# EAGLE board BMS (EAGLE 6.6.0)
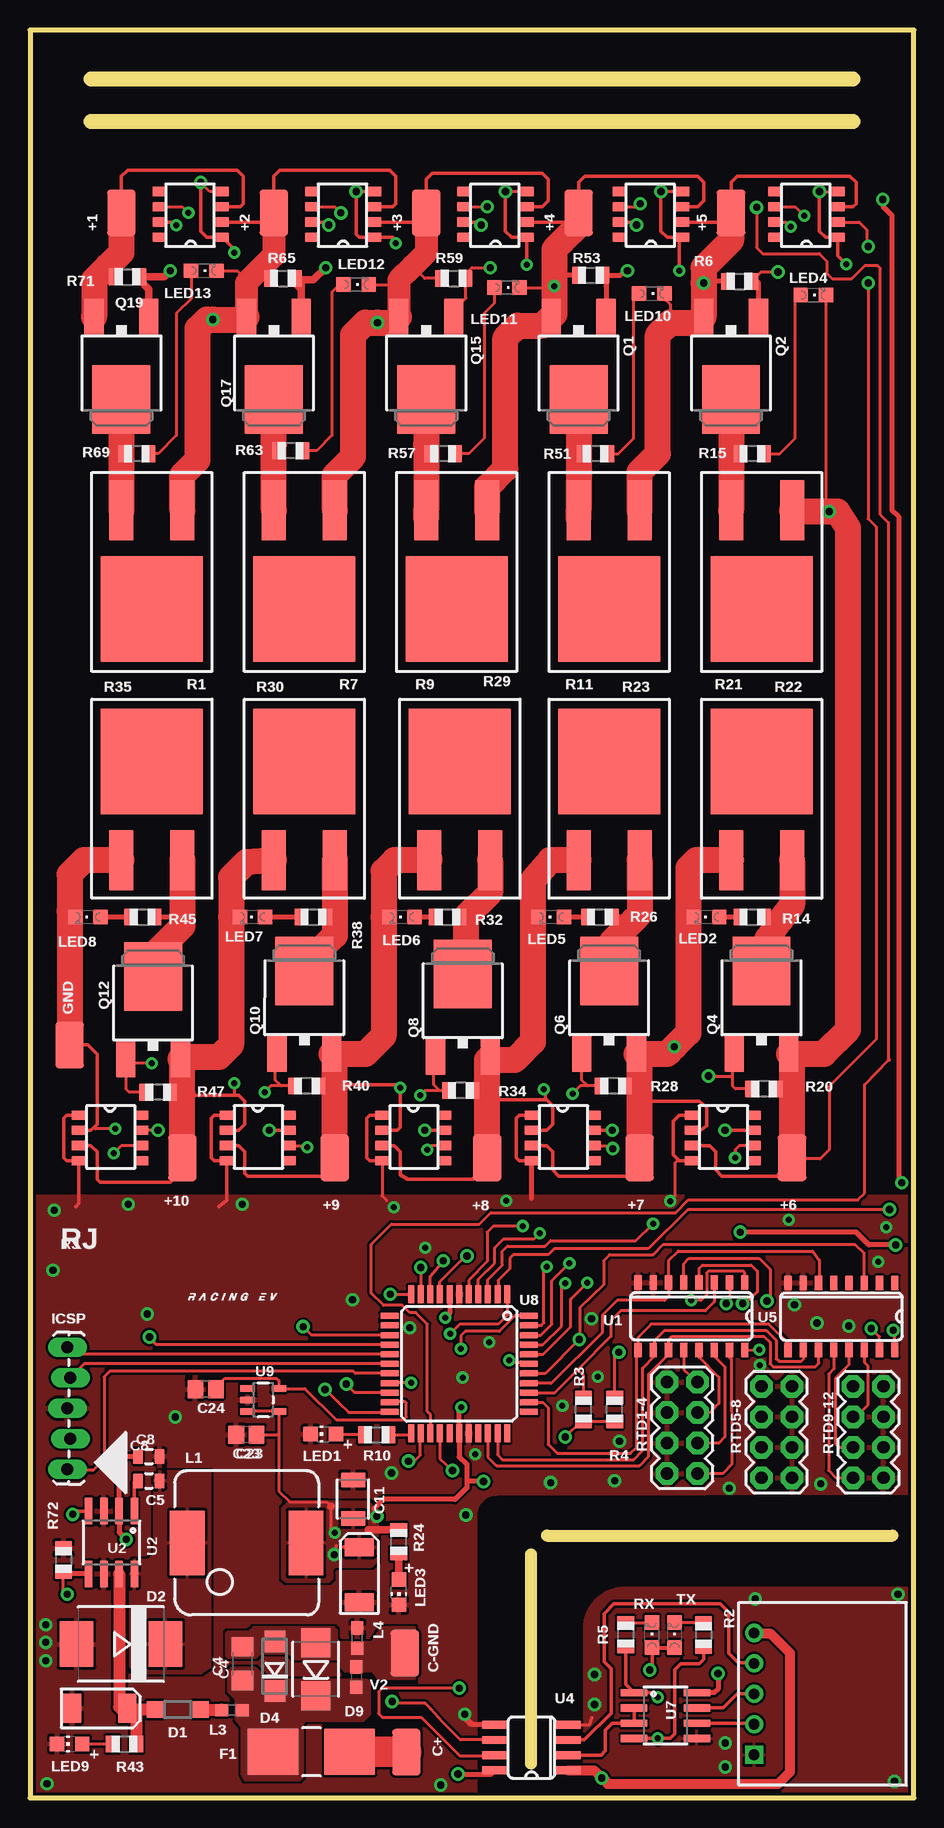
[diagram p0: board, top side]
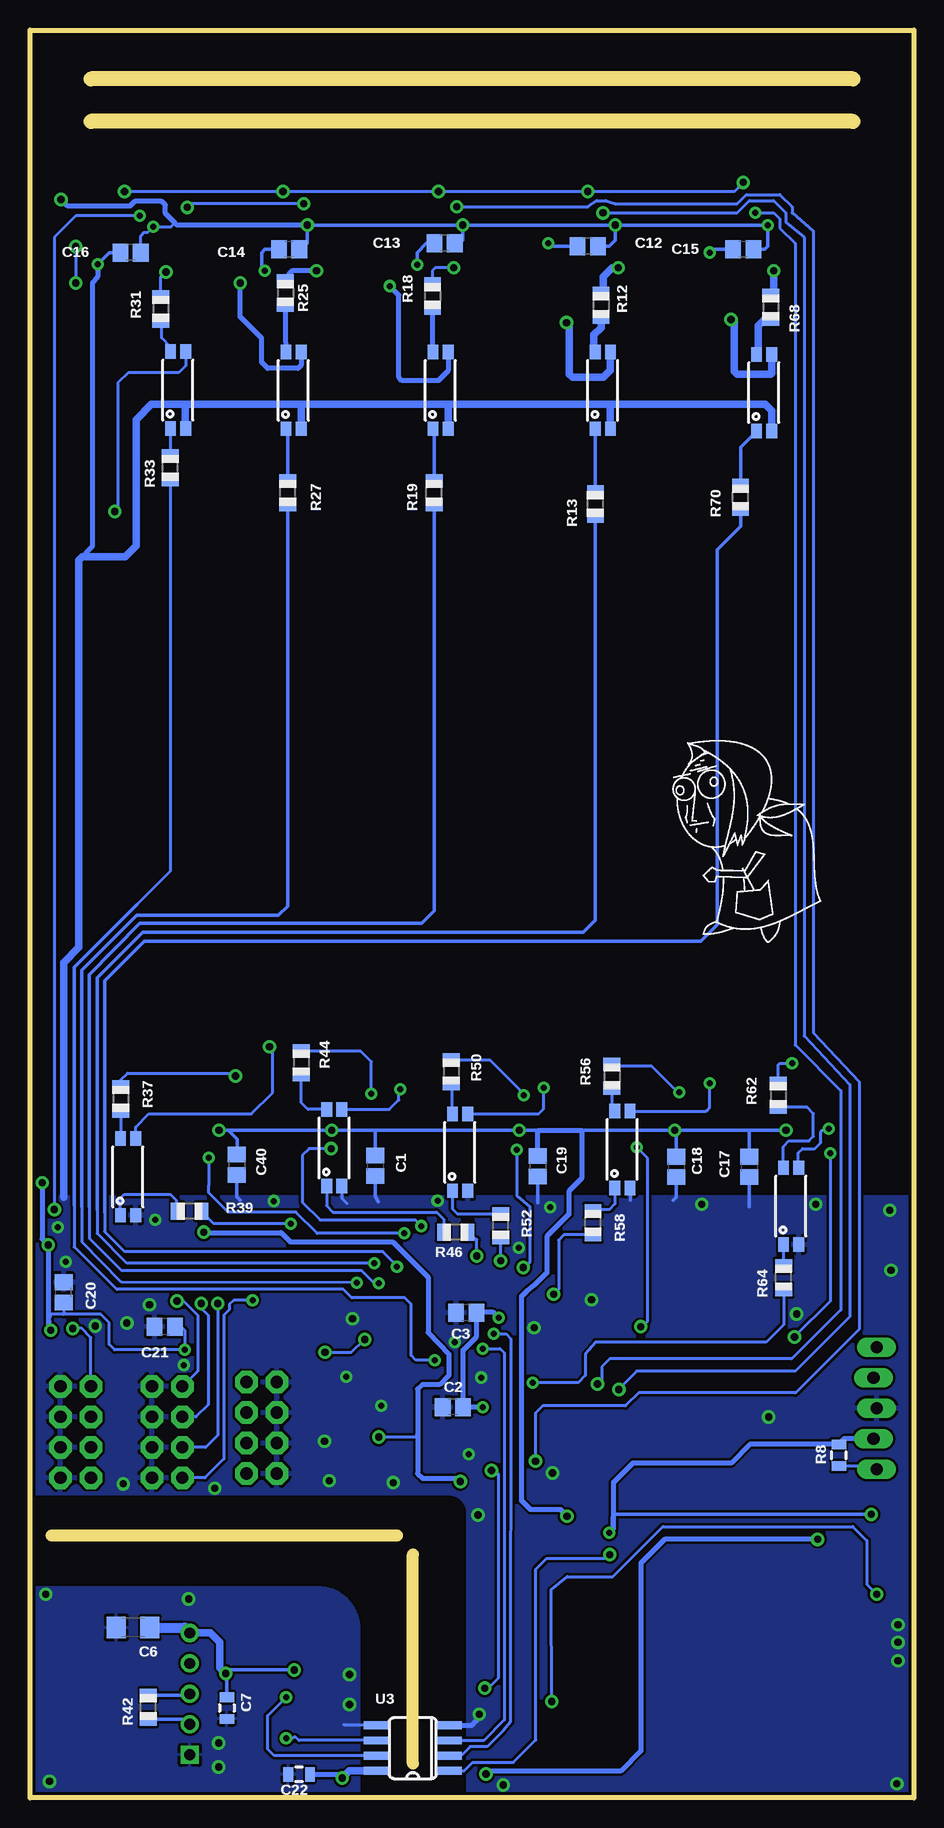
[diagram p1: board, bottom side, seen from below]

Size 73.66 x 147.32 mm. Coordinates in mm from the lower left corner, seen from the top.
Outline: 5.08,143.26 68.58,143.26
Outline: 5.08,139.7 68.58,139.7
Outline: 41.76,2.85 41.76,20.27
Outline: 43.07,21.84 71.88,21.84
Outline: 0,0 73.66,0 73.66,147.32 0,147.32 0,0
Copper layers (1*16): Top 0.035mm / dielectric 1.5mm / Bottom 0.035mm
Design rules "SparkFun": minimum track width 8mil, minimum drill 20mil, track to track 8mil, track to pad 8mil, pad to pad 8mil, via to via 8mil, smd to smd 8mil, copper to edge 10mil, drill to drill 8mil, minimum pad ring 12mil, minimum via ring 10mil, stop-mask expansion 4mil, vias tented up to drill 25mil, thermal gap 10mil

## Footprints (pad centres in the part's own frame; a part is rotated, then mirrored left to right if it is on the bottom)
LUXEON-PAD = smd 3.9 x 2.4: P$1 0,0
C0805 = smd 1.3 x 1.5: 1 -0.85,0; 2 0.85,0
1206 = smd 1.6 x 1.8: 1 -1.4,0; 2 1.4,0
0805 = smd 0.8 x 1.2: 1 -0.9,0; 2 0.9,0
EIA6032 = smd 1.5 x 2.4: P$1 -2.3,0; P$2 2.3,0
1210 = smd 1.2 x 2: 1 -1.6,0; 2 1.6,0
SOD123 = smd 1.4 x 1.4: A 1.9,0; C -1.9,0
SMC = smd 2.8 x 3.8: A 3.7,0; C -3.7,0
DO-214AC = smd 1.8 x 1.7: A 2.05,0; C -2.05,0
SMB-DIODE = smd 2.4 x 2.4: A 2.2,0; C -2.2,0
0154XXDR = smd 4.24 x 3.81: 1 -3.19,0; 2 3.19,0
1X05_LOCK_LONGPADS = drill 1.016 long: 1 0,0; 2 2.54,-0.254; 3 5.08,0; 4 7.62,-0.254; 5 10.16,0
INDUCTOR_5X3 = smd 2.9 x 5.4: 1 -4.95,0; 2 4.95,0
0603 = smd 1.1 x 1: 1 -0.85,0; 2 0.85,0
CHIP-LED0805 = smd 1.2 x 1.2: A 0,-1.05; C 0,1.05
CHIPLED_0805 = smd 1.2 x 1.2: A 0,-1.05; C 0,1.05
DPAK = smd 1.6 x 3: 1 -2.28,-4.04; 3 2.28,-4.04 | smd 4.826 x 5.715: 2 0,2.858
PFC10-5RF1 = smd 2 x 5: 1 -2.54,-8.22; 2 2.54,-8.22 | smd 8.5 x 8.8: TP 0,0
R0805 = smd 1.1 x 1.4: 1 -1,0; 2 1,0
2X4 = drill 1.016 pad 1.88 octagon: 1 -3.81,-1.27; 2 -3.81,1.27; 3 -1.27,-1.27; 4 -1.27,1.27; 5 1.27,-1.27; 6 1.27,1.27; 7 3.81,-1.27; 8 3.81,1.27
SO-16 = smd 0.6 x 1.2: 1 -4.445,-2.8; 2 -3.175,-2.8; 3 -1.905,-2.8; 4 -0.635,-2.8; 5 0.635,-2.8; 6 1.905,-2.8; 7 3.175,-2.8; 8 4.445,-2.8; 9 4.445,2.8; 10 3.175,2.8; 11 1.905,2.8; 12 0.635,2.8; 13 -0.635,2.8; 14 -1.905,2.8; 15 -3.175,2.8; 16 -4.445,2.8
SO-8 = smd 0.61 x 2.21: 1 -1.905,-2.616; 2 -0.635,-2.616; 3 0.635,-2.616; 4 1.905,-2.616; 5 1.905,2.616; 6 0.635,2.616; 7 -0.635,2.616; 8 -1.905,2.616
SOIC-8 = smd 0.66 x 2.032: 1 -1.905,-3.073; 2 -0.635,-3.073; 3 0.635,-3.073; 4 1.905,-3.073; 5 1.905,3.073; 6 0.635,3.073; 7 -0.635,3.073; 8 -1.905,3.073
5-103635-4 = drill 0.9 square: 1 -5.08,0 | drill 0.9: 2 -2.54,0; 3 0,0; 4 2.54,0; 5 5.08,0
TQFP-44 = smd 1.5 x 0.5: 1 -5.8,4; 2 -5.8,3.2; 3 -5.8,2.4; 4 -5.8,1.6; 5 -5.8,0.8; 6 -5.8,0; 7 -5.8,-0.8; 8 -5.8,-1.6; 9 -5.8,-2.4; 10 -5.8,-3.2; 11 -5.8,-4; 23 5.8,-4; 24 5.8,-3.2; 25 5.8,-2.4; 26 5.8,-1.6; 27 5.8,-0.8; 28 5.8,0; 29 5.8,0.8; 30 5.8,1.6; 31 5.8,2.4; 32 5.8,3.2; 33 5.8,4 | smd 0.5 x 1.5: 12 -4,-5.8; 13 -3.2,-5.8; 14 -2.4,-5.8; 15 -1.6,-5.8; 16 -0.8,-5.8; 17 0,-5.8; 18 0.8,-5.8; 19 1.6,-5.8; 20 2.4,-5.8; 21 3.2,-5.8; 22 4,-5.8; 34 4,5.8; 35 3.2,5.8; 36 2.4,5.8; 37 1.6,5.8; 38 0.8,5.8; 39 0,5.8; 40 -0.8,5.8; 41 -1.6,5.8; 42 -2.4,5.8; 43 -3.2,5.8; 44 -4,5.8
SOT23-5 = smd 0.55 x 1.2: 1 -0.95,-1.3; 2 0,-1.3; 3 0.95,-1.3; 4 0.95,1.3; 5 -0.95,1.3
LT1990 = smd 0.762 x 1.143: 1 0,0; 2 1.27,0; 3 2.54,0; 4 3.81,0; 5 3.81,5.207; 6 2.54,5.207; 7 1.27,5.207; 8 0,5.207
SSOP-4 = smd 1.2 x 0.9: 1 -3.2,0.67; 2 -3.2,-0.6; 3 3.2,-0.6; 4 3.2,0.67

## Placement (x,y rotation side)
+1  M01SMD  [LUXEON-PAD]  7.62,132.08 90 top
+2  M01SMD  [LUXEON-PAD]  20.32,132.08 90 top
+3  M01SMD  [LUXEON-PAD]  33.02,132.08 90 top
+4  M01SMD  [LUXEON-PAD]  45.72,132.08 90 top
+5  M01SMD  [LUXEON-PAD]  58.42,132.08 90 top
+6  M01SMD  [LUXEON-PAD]  63.5,53.34 90 top
+7  M01SMD  [LUXEON-PAD]  50.8,53.34 90 top
+8  M01SMD  [LUXEON-PAD]  38.1,53.34 90 top
+9  M01SMD  [LUXEON-PAD]  25.4,53.34 90 top
+10  M01SMD  [LUXEON-PAD]  12.7,53.34 90 top
C1  .1uF  [C0805]  44.89,52.67 270 bottom
C2  .1uF  [C0805]  38.41,32.57 180 bottom
C3  .1uF  [C0805]  37.3,40.43 180 bottom
C4  1uF  [1206]  17.72,11.18 90 top
C5  0.1uF  [0805]  9.91,26.42 0 top
C6  10uF  [1206]  65.07,14.19 180 bottom
C7  .1uF  [0805]  57.26,7.49 270 bottom
C8  0.1uF  [0805]  9.91,28.45 0 top
C9  68uF  [EIA6032]  27.45,18.6 270 top
C10  68uF  [EIA6032]  5.8,7.46 180 top
C11  1uF  [1210]  26.92,24.89 90 top
C12  .1uF  [C0805]  27.18,129.29 180 bottom
C13  .1uF  [C0805]  39.12,129.54 180 bottom
C14  .1uF  [C0805]  52.07,129.03 180 bottom
C15  .1uF  [C0805]  14.22,129.03 180 bottom
C16  .1uF  [C0805]  65.28,128.78 180 bottom
C17  .1uF  [C0805]  13.72,52.58 270 bottom
C18  .1uF  [C0805]  19.81,52.58 270 bottom
C19  .1uF  [C0805]  31.34,52.63 270 bottom
C20  .1uF  [C0805]  70.87,42.11 90 bottom
C21  .1uF  [C0805]  62.43,39.27 180 bottom
C22  .1uF  [0805]  51.24,1.96 180 bottom
C23  .1uF  [C0805]  18.04,30.26 180 top
C24  .1uF  [C0805]  14.64,34.06 180 top
C40  .1uF  [C0805]  56.43,52.76 270 bottom
C+  M01SMD  [LUXEON-PAD]  31.37,3.81 90 top
C-GND  M01SMD  [LUXEON-PAD]  31.24,12.06 270 top
D1  1N4001  [SOD123]  12.31,7.35 0 top
D2  VS-30BQ060TRPBF  [SMC]  7.58,12.82 180 top
D4  TVS  [DO-214AC]  20.41,10.97 90 top
D9  45V  [SMB-DIODE]  23.81,10.71 90 top
F1  01541.25DR  [0154XXDR]  23.44,3.83 180 top
GND  M01SMD  [LUXEON-PAD]  3.3,62.74 270 top
ICSP  [1X05_LOCK_LONGPADS]  3.11,27.39 90 top
L1  7447714101  [INDUCTOR_5X3]  18.05,21.24 0 top
L3  FERITEBEAD  [0603]  16.84,7.31 180 top
L4  FERITEBEAD  [0603]  27.29,13.31 90 top
LED1  [CHIP-LED0805]  24.44,30.32 90 top
LED2  [CHIPLED_0805]  56.39,73.41 90 top
LED3  [CHIP-LED0805]  30.73,17.14 180 top
LED4  [CHIPLED_0805]  65.28,125.22 270 top
LED5  [CHIPLED_0805]  43.43,73.41 90 top
LED6  [CHIPLED_0805]  30.99,73.41 90 top
LED7  [CHIPLED_0805]  18.54,73.41 90 top
LED8  [CHIPLED_0805]  4.83,73.41 90 top
LED9  [CHIP-LED0805]  3.31,4.49 90 top
LED10  [CHIPLED_0805]  51.82,125.35 270 top
LED11  [CHIPLED_0805]  39.75,125.86 270 top
LED12  [CHIPLED_0805]  27.18,126.11 270 top
LED13  [CHIPLED_0805]  14.48,127.25 270 top
Q1  MJD127T4  [DPAK]  45.72,119.38 180 top
Q2  MJD127T4  [DPAK]  58.42,119.38 180 top
Q4  MJD127T4  [DPAK]  60.96,66.04 0 top
Q6  MJD127T4  [DPAK]  48.26,66.04 0 top
Q8  MJD127T4  [DPAK]  36.07,65.79 0 top
Q10  MJD127T4  [DPAK]  22.86,66.04 0 top
Q12  MJD127T4  [DPAK]  10.26,65.6 0 top
Q15  MJD127T4  [DPAK]  33.02,119.38 180 top
Q17  MJD127T4  [DPAK]  20.32,119.38 180 top
Q19  MJD127T4  [DPAK]  7.62,119.38 180 top
R1  PFC10-5RF1  [PFC10-5RF1]  10.16,86.36 0 top
R2  1k  [R0805]  56.13,13.56 270 top
R3  10k  [R0805]  46.13,32.36 90 top
R4  10k  [R0805]  48.72,32.36 90 top
R5  1k  [R0805]  49.63,13.59 270 top
R6  10k  [R0805]  59.13,126.37 0 top
R7  PFC10-5RF1  [PFC10-5RF1]  22.86,86.36 0 top
R8  10k  [0805]  6.26,28.55 90 bottom
R9  PFC10-5RF1  [PFC10-5RF1]  35.81,86.36 0 top
R10  1k  [R0805]  28.9,30.26 0 top
R11  PFC10-5RF1  [PFC10-5RF1]  48.26,86.36 0 top
R12  330  [R0805]  26.08,124.39 270 bottom
R13  200  [R0805]  26.54,107.82 90 bottom
R14  399  [R0805]  60.2,73.41 0 top
R15  399  [R0805]  60.2,112.01 180 top
R18  330  [R0805]  40.12,125.15 270 bottom
R19  200  [R0805]  39.99,108.75 90 bottom
R20  10k  [R0805]  61.17,59.07 180 top
R21  PFC10-5RF1  [PFC10-5RF1]  60.96,86.36 0 top
R22  PFC10-5RF1  [PFC10-5RF1]  60.96,99.06 180 top
R23  PFC10-5RF1  [PFC10-5RF1]  48.26,99.06 180 top
R24  1k  [R0805]  30.73,21.34 90 top
R25  330  [R0805]  52.38,125.4 270 bottom
R26  399  [R0805]  47.5,73.41 0 top
R27  200  [R0805]  52.19,108.75 90 bottom
R28  10k  [R0805]  48.59,59.33 180 top
R29  PFC10-5RF1  [PFC10-5RF1]  35.56,99.06 180 top
R30  PFC10-5RF1  [PFC10-5RF1]  22.86,99.06 180 top
R31  330  [R0805]  62.77,124.08 270 bottom
R32  399  [R0805]  34.8,73.41 0 top
R33  200  [R0805]  61.98,110.83 90 bottom
R34  10k  [R0805]  35.89,58.94 180 top
R35  PFC10-5RF1  [PFC10-5RF1]  10.16,99.06 180 top
R37  330  [R0805]  66.1,58.24 270 bottom
R38  399  [R0805]  23.62,73.41 0 top
R39  200  [R0805]  60.37,48.88 180 bottom
R40  10k  [R0805]  23.07,59.33 180 top
R42  120  [R0805]  63.8,7.56 90 bottom
R43  3.3k  [R0805]  7.88,4.49 0 top
R44  330  [R0805]  51.06,61.27 270 bottom
R45  399  [R0805]  9.4,73.41 0 top
R46  200  [R0805]  38.19,47.14 180 bottom
R47  10k  [R0805]  10.67,58.8 180 top
R50  330  [R0805]  38.56,60.5 270 bottom
R51  399  [R0805]  47.12,112.01 180 top
R52  200  [R0805]  34.43,47.66 90 bottom
R53  10k  [R0805]  46.74,126.87 0 top
R56  330  [R0805]  25.17,60.12 270 bottom
R57  399  [R0805]  34.42,112.01 180 top
R58  200  [R0805]  26.75,47.92 90 bottom
R59  10k  [R0805]  35.31,126.62 0 top
R62  330  [R0805]  11.3,58.55 270 bottom
R63  399  [R0805]  21.72,112.27 180 top
R64  200  [R0805]  10.86,43.35 90 bottom
R65  10k  [R0805]  21.08,126.62 0 top
R68  330  [R0805]  11.94,124.21 270 bottom
R69  399  [R0805]  8.89,112.01 180 top
R70  200  [R0805]  14.45,108.37 90 bottom
R71  10k  [R0805]  8.13,126.75 0 top
R72  10k  [R0805]  2.79,19.81 270 top
RTD1-4  M04X2  [2X4]  54.36,30.84 90 top
RTD5-8  M04X2  [2X4]  62.23,30.48 90 top
RTD9-12  M04X2  [2X4]  69.85,30.48 270 top
RX  [CHIPLED_0805]  51.82,13.56 0 top
TX  [CHIPLED_0805]  53.72,13.56 0 top
U1  SN74LV4051ADR  [SO-16]  55.12,40.13 180 top
U2  MAX5035  [SO-8]  6.79,21.28 180 top
U3  ISO7221ADR  [SOIC-8]  41.76,4.15 90 bottom
U4  ISO7221ADR  [SOIC-8]  41.79,4.19 90 top
U5  SN74LV4051ADR  [SO-16]  67.61,40.11 180 top
U6  M5  [5-103635-4]  60.34,8.66 90 top
U7  SN75HVD08DR  [SO-8]  52.96,6.86 270 top
U8  PIC18F45K22  [TQFP-44]  35.76,36.16 270 top
U9  LM4128CMF-2.0/NOPB  [SOT23-5]  19.44,33.16 270 top
U$1  LT1990  [LT1990]  55.12,56.9 270 top
U$2  LT1990  [LT1990]  41.78,56.9 270 top
U$3  LT1990  [LT1990]  29.34,56.9 270 top
U$4  LT1990  [LT1990]  16.38,56.9 270 top
U$5  LT1990  [LT1990]  4.06,56.9 270 top
U$6  LT1990  [LT1990]  54.36,130.05 90 top
U$7  LT1990  [LT1990]  41.4,130.05 90 top
U$8  LT1990  [LT1990]  28.7,130.05 90 top
U$9  LT1990  [LT1990]  16,130.05 90 top
U$10  TCMT1103-OPTO  [SSOP-4]  12.45,117.09 90 bottom
U$11  TCMT1103-OPTO  [SSOP-4]  25.89,117.29 90 bottom
U$12  TCMT1103-OPTO  [SSOP-4]  39.41,117.29 90 bottom
U$13  TCMT1103-OPTO  [SSOP-4]  51.66,117.29 90 bottom
U$14  TCMT1103-OPTO  [SSOP-4]  61.29,117.32 90 bottom
U$15  TCMT1103-OPTO  [SSOP-4]  65.45,51.75 90 bottom
U$16  TCMT1103-OPTO  [SSOP-4]  48.27,54.17 90 bottom
U$17  TCMT1103-OPTO  [SSOP-4]  37.79,53.79 90 bottom
U$18  TCMT1103-OPTO  [SSOP-4]  24.26,54.03 90 bottom
U$19  TCMT1103-OPTO  [SSOP-4]  10.21,49.31 90 bottom
U$20  INDPK1  [PICKIT-PIN-1]  5.44,27.94 270 top
U$21  OLD_LADYM  [0L-M]  20.24,71.26 0 bottom
U$22  LOGO  [L-MS]  10.16,40.64 0 top
U$55  LT1990  [LT1990]  67.31,130.05 90 top
V2  45Vdc  [0603]  27.18,10.05 270 top

## Library data of the parts
+1-+10 C+ C-GND GND ICSP RTD1-4 RTD5-8 RTD9-12 = SparkFun-Connectors
C1-C3 C12-C21 C23 C24 C40 LED1-LED13 R2-R6 R10 R12-R15 R18-R20 R24-R28 R31-R34 R37-R40 R42-R47 R50-R53 R56-R59 R62-R65 R68-R72 RX TX = adafruit
C4 C11 = SparkFun-Capacitors
C5-C10 C22 R8 = SparkFun-Passives
D1 = diode
D2 U$10-U$19 = SparkFun-DiscreteSemi
D4 L1 = NASA_LIB
D9 = SparkFun
F1 Q1 Q2 Q4 Q6 Q8 Q10 Q12 Q15 Q17 Q19 R1 R7 R9 R11 R21-R23 R29 R30 R35 U1 U2 U5-U8 U$20 = FSAE Eletric
L3 L4 V2 = EmEndev
U3 U4 = Gasbarre
U9 = SparkFun-PowerIC
U$1-U$9 U$55 = Sam_Request
U$21 U$22 = Pic

## Nets
+4.1V: C8.1 U2.2 U4.8
+5V: C1.1 C2.1 C3.1 C9.P$1 C11.1 C12.1 C13.1 C14.1 C15.1 C16.1 C17.1 C18.1 C19.1 C20.1 C21.1 C23.1 C40.1 ICSP.2 L1.2 R3.1 R4.1 R8.2 R24.2 U1.16 U2.4 U3.1 U5.16 U8.7 U8.28 U9.3 U9.4 U$1.7 U$2.7 U$3.7 U$4.7 U$5.7 U$6.7 U$7.7 U$8.7 U$9.7 U$55.7
A: U1.11 U5.11 U8.31
B: U1.10 U5.10 U8.32
B1: R70.1 U8.43
B2: R13.1 U8.42
B3: R19.1 U8.41
B4: R27.1 U8.40
B5: R33.1 U8.39
B6: R39.1 U8.3
B7: R46.1 U8.8
B8: R52.1 U8.9
B9: R58.1 U8.11
B10: R64.1 U8.19
C: U1.9 U5.9 U8.35
C1: U8.20 U$9.6
C2: U8.22 U$8.6
C3: U8.24 U$7.6
C4: U8.25 U$6.6
C5: U8.2 U$55.6
C6: U8.4 U$1.6
C7: U8.5 U$2.6
C8: U8.10 U$3.6
C9: U8.14 U$4.6
C10: U8.15 U$5.6
DIR: U4.2 U7.2 U7.3
EN: U4.3 U6.4
GHT: D1.A L3.2
GND: C1.2 C2.2 C3.2 C8.2 C9.P$2 C10.P$2 C11.2 C12.2 C13.2 C14.2 C15.2 C16.2 C17.2 C18.2 C19.2 C20.2 C21.2 C23.2 C24.2 C40.2 D2.A ICSP.3 L4.2 LED1.C LED3.C LED9.C R72.1 RTD1-4.2 RTD1-4.4 RTD1-4.6 RTD1-4.8 RTD5-8.1 RTD5-8.3 RTD5-8.5 RTD5-8.7 RTD9-12.2 RTD9-12.4 RTD9-12.6 RTD9-12.8 U1.7 U1.8 U2.3 U2.6 U3.4 U4.5 U5.7 U5.8 U8.6 U8.29 U9.2 U$1.1 U$1.4 U$2.1 U$2.4 U$3.1 U$3.4 U$4.1 U$4.4 U$5.1 U$5.4 U$6.1 U$6.4 U$7.1 U$7.4 U$8.1 U$8.4 U$9.1 U$9.4 U$10.2 U$11.2 U$12.2 U$13.2 U$14.2 U$15.2 U$16.2 U$17.2 U$18.2 U$19.2 U$55.1 U$55.4
GNDIO: C6.2 C7.2 C22.2 U3.5 U4.4 U6.1 U7.5
INH: U1.6 U5.6 U8.37
MODE: U4.7 U8.26
N$1: LED1.A R10.1
N$2: R10.2 U8.23
N$3: C10.P$1 D1.C R43.2 U2.7
N$4: RTD1-4.1 U1.15
N$5: RTD1-4.3 U1.14
N$6: C4.1 D4.C D9.C F1.2 L3.1 V2.2
N$7: RTD1-4.5 U1.13
N$8: R72.2 U2.5 U4.6
N$9: +6.P$1 LED4.C Q4.3 R20.1 R22.1 U$1.3 U$14.3 U$55.2
N$10: RTD1-4.7 U1.12
N$11: RTD9-12.1 U5.15
N$12: R2.1 TX.C
N$13: R5.1 RX.C
N$14: RTD9-12.3 U5.14
N$15: LED9.A R43.1
N$16: +9.P$1 LED6.C Q10.3 R9.1 R40.1 U$3.2 U$4.3 U$17.3
N$17: Q2.1 R6.2 R31.1
N$18: +10.P$1 LED7.C Q12.3 R7.1 R47.1 U$4.2 U$5.3 U$18.3
N$19: RTD9-12.5 U5.13
N$20: R70.2 U$10.1
N$21: RTD9-12.7 U5.12
N$22: R13.2 U$11.1
N$23: Q4.1 R20.2 R37.1
N$24: LED4.A R15.1
N$25: LED3.A R24.1
N$26: C5.2 D2.C L1.1 U2.8
N$27: R68.2 U$10.4
N$28: LED2.A R14.1
N$29: R19.2 U$12.1
N$30: Q4.2 R14.2 R21.2
N$31: +8.P$1 LED5.C Q8.3 R11.1 R34.1 U$2.2 U$3.3 U$16.3
N$32: +7.P$1 LED2.C Q6.3 R21.1 R28.1 U$1.2 U$2.3 U$15.3
N$33: Q6.1 R28.2 R44.1
N$34: R44.2 U$16.4
N$35: LED5.A R26.1
N$36: R27.2 U$13.1
N$37: Q6.2 R11.2 R26.2
N$38: C5.1 U2.1
N$39: C24.1 U8.21 U9.5
N$40: ICSP.4 U8.17
N$41: Q8.1 R34.2 R50.1
N$42: R37.2 U$15.4
N$43: ICSP.5 U8.16
N$44: LED6.A R32.1
N$45: R33.2 U$14.1
N$46: ICSP.1 R8.1 U8.18
N$47: Q8.2 R9.2 R32.2
N$48: RTD5-8.2 U1.1
N$49: RTD5-8.4 U1.2
N$50: Q10.1 R40.2 R56.1
N$51: R62.2 U$19.4
N$52: LED7.A R38.1
N$53: R39.2 U$15.1
N$54: Q10.2 R7.2 R38.2
N$55: RTD5-8.6 U1.4
N$56: RTD5-8.8 U1.5
N$57: Q12.1 R47.2 R62.1
N$58: R12.2 U$11.4
N$59: LED8.A R45.1
N$60: R46.2 U$16.1
N$61: Q12.2 R1.2 R45.2
N$62: Q1.1 R25.1 R53.2
N$63: R18.2 U$12.4
N$64: Q2.2 R15.2 R22.2
N$65: R52.2 U$17.1
N$66: LED10.A R51.1
N$67: R25.2 U$13.4
N$68: Q1.2 R23.2 R51.2
N$69: +4.P$1 LED11.C Q1.3 R29.1 R53.1 U$6.3 U$7.2 U$12.3
N$70: +5.P$1 LED10.C Q2.3 R6.1 R23.1 U$6.2 U$13.3 U$55.3
N$72: Q15.1 R18.1 R59.2
N$73: R58.2 U$18.1
N$74: LED11.A R57.1
N$75: R31.2 U$14.4
N$76: Q15.2 R29.2 R57.2
N$77: R64.2 U$19.1
N$78: R50.2 U$17.4
N$79: +3.P$1 LED12.C Q15.3 R30.1 R59.1 U$7.3 U$8.2 U$11.3
N$80: Q17.1 R12.1 R65.2
N$81: R56.2 U$18.4
N$82: LED12.A R63.1
N$83: +1.P$1 Q19.3 R71.1 U$9.3
N$84: Q17.2 R30.2 R63.2
N$87: +2.P$1 LED13.C Q17.3 R35.1 R65.1 U$8.3 U$9.2 U$10.3
N$88: Q19.1 R68.1 R71.2
N$89: GND.P$1 LED8.C R1.1 U$5.2 U$19.3
N$90: LED13.A R69.1
N$92: Q19.2 R35.2 R69.2
RS-A: R42.1 U6.2 U7.6
RS-B: R42.2 U6.3 U7.7
RX: R5.2 U3.7 U7.1
RX1: U3.2 U8.1
T1: R3.2 U1.3 U8.36
T2: R4.2 U5.3 U8.38
TX: R2.2 U3.6 U7.4
TX1: U3.3 U8.44
V+: C6.1 C7.1 C22.1 RX.A TX.A U3.8 U4.1 U6.5 U7.8
VCC: C+.P$1 F1.1
VSS: C4.2 C-GND.P$1 D4.A D9.A L4.1 V2.1

## Tracks (layer width: path | path; a pad name or v marks a point on that pad's centre or on a via)
+4.1V  (via drill 0.6)
  Top 0.406: C8.1 7.93,28.45 7.43,27.95 U2.2 7.43,22.14 v8.03,21.54 | v35.66,1.98 38.41,1.98 U4.8
  Bottom 0.406: v8.03,21.54 20.78,21.54 22.76,19.56 22.76,3.91 24.44,2.23 35.41,2.23 v35.66,1.98
+5V  (via drill 0.5, 0.6)
  Top 0.254: v10.67,55.63 U$5.7 | U$1.7 60.35,55.63 | U1.16 60.68,37.31 v60.76,37.34 | U5.16 72.06,38.79 v71.93,38.96 | U$55.7 62.99,131.32 v63.4,130.91 | v25.35,20.27 25.35,20.52 25.5,20.68 25.5,20.98 25.55,21.03 | R4.1 R3.1 45.89,31.36 v44.6,30.07 | U9.3 U9.4 20.74,30.36 | 20.74,30.36 20.74,25.56 21.64,24.66 24.74,24.66 25.04,24.36 25.04,22.45 v25.4,22.1 | C23.1 20.64,30.26 20.74,30.36
  Top 0.305: U$9.7 11.94,131.32 v12.19,131.06 | U$6.7 50.29,131.32 v50.55,131.06 | U$7.7 37.08,131.32 37.34,131.06 v37.59,131.06 | U$8.7 24.64,131.32 v24.89,131.06 | U$2.7 v48.51,55.63 46.74,55.63 | v57.91,55.63 U$1.7 | U$3.7 v32.89,55.63 | U$4.7 v19.94,55.63 | U2.4 3.83,23.9 v3.56,23.62 | 26.16,20.91 C9.P$1 | v25.4,22.1 25.4,22.35
  Top 0.406: 36.4,26.47 36.4,27.84 35.76,28.42 U8.28 35.76,32.39 v35.94,32.56 | 36.4,26.47 36.4,25.83 35.43,24.87 29.41,24.87 28.65,24.1 | U8.7 34.96,40.37 v34.6,40 | v28.91,23.47 28.91,23.27 28.7,23.06 | v72.14,46.08 69.9,46.08 68.83,47.14 v59.18,47.14 | v37.8,26.36 36.5,26.36 36.4,26.47 | v71.07,133.2 71.07,132.64 71.83,131.88 71.83,107.34 72.39,106.78 72.39,51.51 v72.64,51.26
  Top 0.61: R24.2 28.21,22.34 28.19,22.35 | 25.07,24.28 25.1,24.28
  Bottom 0.254: 70.87,40.28 67.77,40.28 67.06,39.57 67.06,37.8 66.6,37.34 v60.76,37.34 60.76,38.96 61.06,39.27 C21.1 | 70.87,40.28 71.93,40.28 72.03,40.03 v71.93,38.96 | 61.6,131.24 61.93,130.91 v63.4,130.91 63.86,130.45 64.16,130.45 64.43,130.19 C16.1 | U3.1 37.49,2.24 36.78,2.95 33.38,2.95 31.5,4.83 31.5,19.05 30.58,19.96 25.65,19.96 v25.35,20.27 | v44.6,30.07 41.5,30.07 41.35,30.23 | C20.1 70.87,40.28 | C2.1 37.56,32.76 37.56,32.77
  Bottom 0.305: v24.89,131.06 v12.19,131.06 12.19,129.29 12.45,129.03 C15.1 | v24.89,131.06 v37.59,131.06 | v37.59,131.06 v50.55,131.06 50.55,129.54 51.05,129.03 C14.1 | 57.15,55.63 v48.51,55.63 44.96,55.63 | 44.96,55.63 v32.89,55.63 31.37,55.63 | v19.94,55.63 27.69,55.63 | 31.29,55.63 31.37,55.63 | v10.67,55.63 13.72,55.63 | 13.72,55.63 v19.94,55.63 | v3.56,23.62 24.89,23.62 25.15,23.37 25.15,22.35 v25.4,22.1 | C12.1 25.4,129.29 24.89,129.79 v24.89,131.06 | C13.1 37.85,129.54 37.59,129.79 v37.59,131.06 | C40.1 56.41,54.88 57.15,55.63 | 57.15,55.63 v57.91,55.63 | C1.1 44.89,55.55 44.96,55.63 | C19.1 31.37,55.63 | C18.1 19.81,55.5 v19.94,55.63 | C17.1 13.72,55.63
  Bottom 0.406: v35.94,32.56 C2.1 37.56,32.77 37.56,37.32 36.45,38.43 C3.1 36.42,40.46 35.05,40.46 v34.6,40 | C19.1 31.34,55.58 31.29,55.63 27.69,55.63 27.69,51.61 28.75,50.55 28.75,48.62 30.58,46.79 30.58,43.74 31.6,42.77 32.31,42.16 32.72,41.76 32.72,24.79 31.95,24.03 29.46,24.03 v28.91,23.47 | v37.8,26.36 38.05,26.62 40.95,26.62 41.35,27.03 41.35,30.23 41.35,34.09 40.95,34.44 39.52,34.44 38.76,35.2 38.76,36.98 40.49,38.76 40.49,43.38 43.43,46.33 51.97,46.33 52.73,47.09 59.03,47.09 v59.18,47.14 | v71.93,38.96 72.14,39.22 v72.14,46.08 72.64,46.58 v72.64,51.26 | v50.55,131.06 61.42,131.06 61.6,131.24 62.38,132.03 62.38,132.74 62.69,133.04 64.92,133.04 65.33,132.64 70.51,132.64 v71.07,133.2 | ICSP.2 5.79,29.92 R8.2 13.68,29.45 15.24,27.89 23.42,27.89 25.04,26.26 25.04,22.45 v25.4,22.1
  pour Top: 21.59,24.64 28.19,24.64 28.96,23.88 28.96,19.81 28.45,19.3 25.4,19.3 25.15,19.05 25.15,18.29 24.89,18.03 21.34,18.03 21.08,18.29 21.08,24.13
A
  Top 0.254: U8.31 38.16,28.38 38.86,27.69 50.8,27.69 51.56,28.45 51.56,35.31 53.09,36.83 53.09,37.2 U1.11 53.21,38.18 53.49,38.46 61.16,38.46 61.67,37.95 61.67,36.17 61.93,35.92 65.43,35.92 65.74,36.22 65.74,37.28 U5.11
B
  Top 0.254: 38.86,30.23 38.96,30.33 U8.32 38.96,28.6 39.37,28.19 50.29,28.19 51.05,28.96 51.05,35.81 52.07,36.83 52.07,37.2 | 52.07,37.2 U1.10 | 64.47,37.33 U5.10 64.47,37.28 64.47,36.58 64.26,36.37 62.43,36.37 62.18,36.58 62.18,38.15 61.37,38.96 52.88,38.96 52.07,38.15 52.07,37.2
B1  (via drill 0.5)
  Top 0.254: 41.57,39.37 U8.43 42.61,39.36 42.82,39.57 42.82,43.99 v43.08,44.25
  Bottom 0.254: 67.44,48.77 67.44,47.19 65.76,45.52 44.25,45.52 43.08,44.35 v43.08,44.25
  Bottom 0.305: R70.1 14.45,105.95 16.38,104.01 16.38,72.77 17.78,71.37 64.13,71.37 67.44,68.07 67.44,48.77
B2  (via drill 0.5)
  Top 0.254: U8.42 42.58,38.56 43.49,39.47 43.49,43.08 v44.96,44.55
  Bottom 0.254: 68.07,49.02 68.07,47.04 65.58,44.55 v44.96,44.55
  Bottom 0.305: R13.1 26.54,73.15 27.56,72.14 64.26,72.14 68.07,68.33 68.07,49.02
B3  (via drill 0.5)
  Top 0.254: U8.41 42.74,37.76 44.3,39.32 44.3,42.57 v44.6,42.88
  Bottom 0.254: 68.71,49.28 68.71,46.63 66.01,43.94 46.02,43.94 44.96,42.88 v44.6,42.88
  Bottom 0.305: R19.1 39.99,73.93 41.02,72.9 64.52,72.9 68.71,68.58 68.71,49.28
B4  (via drill 0.5)
  Top 0.254: U8.40 42.75,36.96 45.06,39.27 45.06,41.55 v46.43,42.93
  Bottom 0.254: 69.34,49.28 69.34,46.33 66.04,42.98 v46.43,42.93
  Bottom 0.305: R27.1 52.19,74.3 52.96,73.53 64.77,73.53 69.34,68.96 69.34,49.28
B5  (via drill 0.5)
  Top 0.254: U8.39 41.65,36.25 40.16,36.25 v39.93,36.47
  Bottom 0.254: 69.98,49.4 69.98,45.92 66.42,42.37 47.55,42.37 46.84,41.66 42.42,41.66 41.91,41.15 41.91,36.88 41.5,36.47 v39.93,36.47 | R33.1 61.98,77.21 64.77,74.42
  Bottom 0.305: 64.77,74.42 69.98,69.22 69.98,49.4
B6  (via drill 0.5)
  Top 0.254: U8.3 38.16,43.19 39.37,44.4 39.37,45.57 39.78,45.97 42.93,45.97 43.38,46.43 50.5,46.43 v51.92,47.85
  Bottom 0.254: v51.92,47.85 58.34,47.85 R39.1
B7  (via drill 0.6)
  Top 0.254: U8.8 34.16,43 36.32,45.16 v36.42,45.16
  Bottom 0.254: v36.42,45.16 36.42,46.52 R46.1
B8  (via drill 0.6)
  Top 0.254: U8.9 33.36,43.47 v34.44,44.75
  Bottom 0.254: v34.44,44.75 34.44,45.51 R52.1
B9  (via drill 0.6)
  Top 0.254: v30.02,41.96 U8.11
  Bottom 0.254: R58.1 29.18,46.92 29.62,46.48 29.62,42.37 v30.02,41.96
B10  (via drill 0.5)
  Top 0.254: v31.75,34.59 30,34.59 U8.19
  Bottom 0.254: R64.1 10.86,39.43 12.32,37.97 26.52,37.97 27.38,36.96 27.38,35.2 27.99,34.59 v31.75,34.59
C
  Top 0.254: U8.35 42.73,32.96 43.18,32.51 43.18,29.46 43.94,28.7 50.04,28.7 50.55,29.21 50.55,37.2 U1.9 50.65,37.36 50.65,38.35 51.76,39.47 61.57,39.47 63.17,37.87 U5.9
C1  (via drill 0.5, 0.6)
  Top 0.254: U$9.6 12.7,132.59 v13.21,132.08 | v26.37,34.49 27.03,33.78 29.94,33.78 U8.20
  Bottom 0.254: v13.21,132.08 11.68,132.08 11.18,131.57 11.18,130.81 9.91,129.54 9.91,62.74 6.1,58.93 6.1,40.66 10.19,36.58 25.35,36.58 26.01,35.92 26.01,34.8 v26.37,34.49
C2  (via drill 0.6)
  Top 0.254: U$8.6 25.4,132.59 v25.91,132.08 | v24.59,34.04 25.71,32.97 26.54,32.13 29.93,32.13 U8.22
  Bottom 0.254: v25.91,132.08 14.73,132.08 13.72,133.1 11.68,133.1 10.67,132.08 10.67,131.32 9.14,130.05 9.14,63.5 5.33,59.44 5.33,40.11 9.88,35.56 23.11,35.56 v24.59,34.04
C3  (via drill 0.6)
  Top 0.254: U$7.6 v38.1,132.59 | v31.54,28.06 32.04,28.06 32.54,28.56 32.54,30.34 U8.24
  Bottom 0.254: v38.1,132.59 27.18,132.59 26.42,133.1 25.65,133.1 24.89,132.84 14.73,132.84 13.97,133.6 11.18,133.6 10.16,132.59 10.16,132.08 8.38,130.56 8.38,63.75 4.57,59.69 4.57,39.04 9.86,33.76 22.94,33.76 24.04,32.66 30.94,32.66 31.54,32.06 v31.54,28.06
C4  (via drill 0.6)
  Top 0.254: U$6.6 50.5,132.59 50.75,132.84 v50.85,132.84 | v60.55,132.54 60.55,129.18 61.06,128.68 65.79,128.68 66.4,128.07 66.4,127.05 66.85,126.59 68.48,126.59 69.55,127.66 70.66,127.66 70.87,127.46 70.87,106.93 71.53,106.27 71.53,61.47 | 71.53,61.47 69.55,59.44 69.55,50.39 68.99,49.83 54.86,49.83 53.8,48.77 38.41,48.77 37.44,47.8 30.12,47.8 28.45,46.13 28.45,42.06 29.46,41.05 31.04,41.05 31.65,40.44 32.16,40.44 33.12,39.47 33.12,32.18 33.34,31.96 33.34,30.39 U8.25 | 71.53,61.47 71.63,61.52
  Bottom 0.254: v50.85,132.84 60.25,132.84 v60.55,132.54
C5  (via drill 0.5, 0.6)
  Top 0.254: U$55.6 63.75,132.59 v64.52,131.83 | v71.63,49.02 54.81,49.02 51.51,45.77 43.69,45.77 43.18,45.26 40.28,45.26 39.98,44.96 39.98,44.09 39.01,43.13 39.01,42.01 U8.2
  Bottom 0.254: v64.52,131.83 69.85,131.83 71.63,130.05 v71.63,49.02 71.6,49.61
C6  (via drill 0.5)
  Top 0.254: 59.94,54.36 59.11,54.36 58.75,54 v58.75,53.34 | U8.4 37.36,43.21 38.71,44.55 38.71,45.82 39.47,46.58 42.01,46.58 v42.47,47.04
  Top 0.305: U$1.6 59.94,54.36
  Bottom 0.254: v58.75,53.34 58.75,51.03 58.78,51 58.78,50.44 57.15,48.82 51.51,48.82 49.73,47.04 v42.47,47.04
C7  (via drill 0.5, 0.6)
  Top 0.254: U$2.6 48.31,54.36 v48.57,54.1 | v41.05,47.65 38.61,47.65 38.1,47.14 38.1,44.7 36.58,43.13 36.58,41.97 U8.5
  Bottom 0.254: v48.57,54.1 50.39,54.1 50.95,53.54 50.95,49.63 49.48,48.16 41.55,48.16 v41.05,47.65
C8  (via drill 0.5, 0.6)
  Top 0.254: U$3.6 33.45,54.36 v33.1,54 | v32.56,44.2 U8.10
  Bottom 0.254: v33.1,54 33.1,50.14 33.07,50.14 32,49.28 32,44.65 v32.56,44.2
C9  (via drill 0.5, 0.6)
  Top 0.254: U$4.6 22.96,54.36 v23.11,54.2 | U8.14 23.47,38.56 v22.76,39.27
  Bottom 0.254: 23.11,54.18 v23.11,54.2 22.2,53.29 22.2,39.73 22.66,39.27 v22.76,39.27
C10  (via drill 0.5, 0.6)
  Top 0.254: U$5.6 7.62,54.36 v6.99,53.72 | U8.15 29.93,37.8 10.52,37.8 10.41,37.9 v9.96,38.41
  Bottom 0.254: v6.99,53.72 6.99,41.38 v9.96,38.41
DIR
  Top 0.305: U7.2 U7.3 50.32,6.2 48.51,6.2 47.96,5.64 47.96,3.91 47.6,3.55 U4.2
EN
  Top 0.305: U4.3 46.2,4.82 48.44,7.06 48.44,10.76 47.84,11.36 47.84,15.36 48.64,16.16 57.54,16.16 58.24,15.46 58.24,12.06 59.04,11.26 60.28,11.26 U6.4
GHT
  Top 1.016: D1.A 15.94,7.35 L3.2
GND  (via drill 0.5, 0.6)
  Top 0.254: U$9.4 14.99,133.86 v14.22,134.62 | v65.79,133.86 U$55.4 | U$8.4 v27.18,133.86 | U$7.4 v39.62,133.86 | U$6.4 v52.58,133.86 | U$3.4 29.34,50.16 29.72,49.78 | U$1.4 53.95,53.09 53.75,52.88 53.75,50.14 v53.34,49.73
  Top 0.305: v14.22,134.62 14.22,130.56 14.73,130.05 U$9.1 17.02,129.03 v17.02,128.78 | v27.18,133.86 27.18,130.3 27.43,130.05 U$8.1 30.23,130.05 30.48,129.79 v30.48,129.54 | v39.62,133.86 39.62,130.56 40.13,130.05 U$7.1 v41.4,127.76 | v52.58,133.86 52.58,130.56 53.09,130.05 U$6.1 54.1,129.79 v54.1,127.25 | U$1.1 54.1,56.9 53.59,56.39 53.59,53.59 54.1,53.09 U$1.4 | U$2.1 40.77,56.9 40.51,56.64 40.51,53.34 40.77,53.09 U$2.4 | U$4.1 15.37,56.9 15.11,56.64 15.11,53.34 15.37,53.09 U$4.4 16.38,49.78 15.75,49.28 | U$3.4 28.32,53.09 28.07,53.34 28.07,56.64 28.32,56.9 U$3.1 | U$5.1 3.05,56.9 2.79,56.64 2.79,53.34 3.05,53.09 U$5.4 4.06,49.53 3.81,49.28 | v65.79,133.86 65.79,130.56 66.29,130.05 U$55.1 67.31,128.52 v68.02,127.81
  Top 0.406: U$2.4 41.78,49.96 | 36.42,6.45 36.78,6.09 U4.5 36.88,6.09 36.58,6.4
  Bottom 0.254: v14.22,134.62 14.99,133.86 v27.18,133.86 v39.62,133.86 v52.58,133.86 v65.79,133.86 | U$16.2 47.67,49.96 47.24,49.53 | U$18.2 23.66,49.82 23.62,49.78
  Bottom 0.305: C15.2 16.76,129.03 v17.02,128.78 | C12.2 30.23,129.29 v30.48,129.54 | C13.2 40.64,129.54 41.4,128.78 v41.4,127.76 | C14.2 54.1,129.03 54.36,128.78 54.36,127.51 v54.1,127.25 | C16.2 67.06,128.78 v68.02,127.81 | C40.2 56.43,50.08 56.13,49.78 | C1.2 44.89,50.12 44.65,49.68 | C19.2 31.34,49.58 | C18.2 19.81,50.04 20.07,49.78 | C17.2 13.72,49.28
  Bottom 0.406: v68.02,127.81 68.02,126.77 68.45,126.24 68.45,104.32 69.6,103.12 | U3.4 36.82,6.05 36.42,6.45
  Bottom 0.61: 70.87,50.04 70.87,69.6 69.6,70.87 69.6,103.12 69.29,103.43 65.74,103.43 64.82,104.34 64.82,114.86 63.55,116.13 60.71,116.13 | U$10.2 11.85,115.58 12.39,116.13 25.25,116.13 | 25.25,116.13 38.91,116.13 | 38.91,116.13 51.11,116.13 | 51.11,116.13 60.71,116.13 | 60.71,116.13 60.71,114.13 U$14.2 | U$13.2 51.06,116.08 51.11,116.13 | U$12.2 38.81,116.02 38.91,116.13 | U$11.2 25.29,116.09 25.25,116.13
  other vias: 70.69,44.68 30.3,49.2 39.7,49.76 63.22,48.16 9.77,40.31 1.91,43.97 49.12,29.72 30.12,27.08 31.65,39.17 26.87,41.5 36.32,23.57 8.19,49.47 46.79,39.93 63.7,41.1 12.11,31.74 58.27,25.81 65.89,26.16 48.72,26.42 60.83,36.07 1.32,14.43 1.32,12.95 1.32,11.43 71.35,47.55 68.22,39.32 36.04,35.03 32.94,45.85 38.28,37.97 37.11,28.63 44.37,32.69 47.32,35.08 36.22,6.97 1.42,1.17 34.22,1.07 2.02,48.97 17.69,49.47 65.59,39.57 43.39,26.27
  pour Bottom: 0,0 37.08,0 37.08,23.7 arc-90 38.79,25.4 73.66,25.4 73.66,50.04 0,50.04
  pour Top (rank 4): 0,0 37.08,0 37.08,23.6 arc-90 38.88,25.4 73.66,25.45 73.66,50.09 -0.13,50.04
GNDIO  (via drill 0.6)
  Top 0.254: U4.4 46.63,6.09 46.84,6.71
  Bottom 0.254: U3.5 47.45,6.05 47.5,6.09
  other vias: 47.04,7.77 57.94,4.57 60.44,16.57 72.34,16.97 72.04,1.37 47.04,10.27 57.94,2.57
  pour Bottom: 73.66,0.25 46.23,0 46.23,14.07 arc-90 49.68,17.53 73.66,17.53
  pour Top: 73.66,0.25 46.23,0 46.23,14.12 arc-90 49.64,17.53 73.66,17.53
INH
  Top 0.254: U8.37 41.58,34.54 43.43,34.54 47.7,38.76 47.7,40.23 48.92,41.45 52.88,41.45 53.21,41.78 U1.6 53.24,42.96 53.24,44.81 54,45.57 65.23,45.57 65.79,44.81 65.79,42.98 U5.6
MODE  (via drill 0.6)
  Top 0.254: U8.26 34.16,28.27 v35.2,27.28 | v35.76,9.14 29.36,9.14 29.06,8.84 29.06,7.01 29.36,6.71 32.61,6.71 35.81,3.5 38.67,3.5 U4.7
  Bottom 0.254: v35.2,27.28 34.95,27.28 34.65,27.03 34.65,9.96 35.46,9.14 v35.76,9.14
N$1
  Top 0.254: LED1.A 27.84,30.32 R10.1
N$2
  Top 0.254: R10.2 31.66,30.26 U8.23
N$3
  Top 1.016: U2.7 7.43,7.56 8.13,6.86 8.13,7.43 C10.P$1 8.54,7.02 | R43.2 8.88,6.68 8.54,7.02 | D1.C 8.88,7.35 8.54,7.02
N$4
  Top 0.254: U1.15 58.29,36.7 58.42,36.58 58.47,27.79 57.71,27.03 RTD1-4.1
N$5
  Top 0.254: U1.14 57.02,36.8 57.91,35.92 57.91,30.07 57.4,29.57 RTD1-4.3
N$6
  pour Top (no thermals): 17.14,8.25 17.14,6.6 17.65,5.97 17.65,2.03 17.91,1.52 22.48,1.52 22.73,1.78 22.73,6.22 22.99,6.48 27.81,6.48 28.32,6.98 28.32,9.52 28.07,9.78 19.81,9.78 18.8,10.8 16.76,10.8 16.51,10.54 16.51,8.89
N$7
  Top 0.254: U1.13 55.75,36.7 57.4,35.05 57.4,32.87 56.64,32.11 RTD1-4.5
N$8  (via drill 0.6)
  Top 0.254: 2.74,18.69 2.74,17.32 v3.1,16.97 | U4.6 35.87,4.82 34.39,6.3 33.38,7.42 32.92,7.87 30.33,7.87 v30.18,8.03
  Top 0.406: U2.5 2.94,18.66 R72.2 | U2.5 3.08,18.66 3,18.74 | U2.5 2.77,18.66 2.74,18.69
  Bottom 0.254: v30.18,8.03 30.23,17.32 28.91,18.44 25.1,18.44 20.93,22.61 5.08,22.61 3.91,21.44 3.91,17.78 v3.1,16.97
N$9  (via drill 0.6)
  Top 0.254: LED4.C 66.33,107.22 66.29,107.19 | R20.1 63.39,59.07 63.5,59.18 | U$55.2 69.09,131.32 69.75,130.66 69.75,129.39 v69.85,129.29 | v66.6,107.19 67.14,107.19 67.59,106.74 | v69.85,126.24 69.85,106.58 70.51,105.92 70.51,63.19 66.6,59.28 66.6,54 65.84,53.24 63.6,53.24 +6.P$1
  Top 0.305: U$1.3 56.64,54.36 57.15,53.85 57.15,52.32 57.66,51.82 62.23,51.82 +6.P$1
  Top 2.184: R22.1 63.59,107.19 66.29,107.19 v66.6,107.19 67.31,107.19 67.59,106.74 68.17,105.82 68.17,64.01 66.17,62 Q4.3 63.5,61.74 63.5,59.18 +6.P$1
  Bottom 0.254: v69.85,129.29 v69.85,126.24 | U$14.3 60.69,119.35 61.26,118.77 65.46,118.77 66.33,117.91 66.33,107.46 v66.6,107.19
N$10
  Top 0.254: U1.12 54.48,35.69 RTD1-4.7
N$11  (via drill 0.6)
  Top 0.254: U5.15 70.79,38.43 v70.1,39.12
  Bottom 0.254: RTD9-12.1 68.58,38.35 69.34,39.12 v70.1,39.12
N$12
  Top 0.254: TX.C 56.08,14.61 R2.1
N$13
  Top 0.254: R5.1 51.8,14.59 RX.C
N$14
  Top 0.254: RTD9-12.3 68.83,31.75 69.85,32.77 69.85,35.97 69.55,36.27 69.55,37.28 U5.14
N$15
  Top 0.254: LED9.A R43.1
N$16  (via drill 0.5)
  Top 0.254: R40.1 25.38,59.33 25.4,59.31 | v30.86,59.18 30.73,59.18 30.48,59.44
  Top 0.305: U$4.3 17.4,54.36 17.91,53.85 17.91,52.07 18.16,51.82 24.26,51.82 +9.P$1 | U$3.2 30.61,55.63 30.86,55.88 v30.86,59.18 30.61,59.44 30.48,59.44 25.65,59.44 25.4,59.18
  Top 0.406: LED6.C 29.46,73.41
  Top 2.184: 33.02,78.49 33.27,78.23 R9.1 30.39,78.14 29.46,77.22 29.46,73.41 29.46,63.5 27.94,61.98 25.16,61.98 Q10.3 25.4,61.74 25.4,59.31 25.4,59.18 +9.P$1
  Bottom 0.254: U$17.3 31.27,56.99 30.86,57.4 v30.86,59.18
N$17  (via drill 0.6)
  Top 0.254: v62.33,127.15 60.92,127.15 R6.2
  Top 0.406: R6.2 60.57,126.37 60.71,126.24 60.71,124.21 60.96,124.21 60.96,123.68 Q2.1
  Bottom 0.254: R31.1 62.77,126.72 v62.33,127.15
N$18  (via drill 0.5)
  Top 0.254: R47.1 12.57,58.8 12.7,58.67 | v17.02,59.56 17.02,58.67 17.14,58.55
  Top 0.305: U$4.2 17.4,55.63 17.91,56.13 17.91,58.04 17.4,58.55 17.14,58.55 12.7,58.55 | U$5.3 5.08,54.36 5.59,53.85 5.59,51.56 5.84,51.31 11.68,51.31 12.45,52.07 12.95,53.09 +10.P$1
  Top 0.61: LED7.C 16.76,73.41
  Top 2.184: R7.1 18.03,77.98 16.76,76.71 16.76,73.41 16.76,62.74 15.75,61.72 12.71,61.72 Q12.3 12.7,61.4 12.7,58.67 12.7,58.55 +10.P$1
  Bottom 0.254: U$18.3 17.32,57.23 17.02,57.53 v17.02,59.56
N$19
  Top 0.254: U5.13 68.25,36.09 67.11,34.95 67.11,29.52 67.41,29.21 RTD9-12.5
N$20
  Bottom 0.305: R70.2 14.45,112.56 U$10.1
N$21
  Top 0.254: U5.12 66.98,35.74 66.55,35.31 66.55,27.28 67.16,26.67 RTD9-12.7
N$22
  Bottom 0.305: R13.2 26.54,114.07 U$11.1
N$23  (via drill 0.6)
  Top 0.254: R20.2 58.79,59.07 58.55,59.31 58.55,60.05 | 58.55,60.05 58.55,61.87 Q4.1 | v56.54,60.15 58.45,60.15 58.55,60.05
  Bottom 0.254: R37.1 66.1,59.83 65.53,60.4 56.79,60.4 v56.54,60.15
N$24
  Top 0.254: R15.1 62.48,112.01 63.75,113.28 63.75,124.75 LED4.A
N$25
  Top 0.61: R24.1 LED3.A
N$26
  pour Top: 8.89,10.41 14.22,10.41 14.99,10.92 14.99,27.18 10.41,27.18 10.41,20.32 9.91,19.81 8.64,19.81 8.38,19.56 8.38,10.92
N$27
  Bottom 0.61: R68.2 12.43,123.21 12.95,122.68 12.95,120.46 U$10.4
N$28
  Top 0.406: LED2.A R14.1
N$29
  Bottom 0.305: R19.2 39.99,114 U$12.1
N$30
  Top 0.406: R14.2 62.33,73.41 62.58,73.15
  Top 2.184: R21.2 63.5,74.42 62.58,73.15 61.47,71.63 61.47,68.58 60.96,68.07 Q4.2
N$31  (via drill 0.5)
  Top 0.254: R34.1 37.86,58.94 38.1,59.18 | v42.8,59.05 42.93,58.93 42.93,58.29 43.05,58.17
  Top 0.305: U$2.2 43.05,55.63 43.56,56.13 43.56,57.66 43.05,58.17 38.1,58.17 | U$3.3 30.35,54.36 30.86,53.85 30.86,51.94 31.5,51.56 36.96,51.56 +8.P$1
  Top 0.406: 38.1,59.61 38.1,59.44 | LED5.C 41.91,73.41
  Top 2.184: R11.1 43.34,78.14 41.91,76.45 41.91,73.41 41.91,62.99 40.39,61.47 38.12,61.47 Q8.3 38.1,61.49 38.1,59.44 38.1,59.18 38.1,58.17 +8.P$1
  Bottom 0.254: U$16.3 43.72,57.37 42.93,58.17 42.93,58.93 v42.8,59.05
N$32  (via drill 0.6)
  Top 0.254: R28.1 50.53,59.33 50.8,59.05
  Top 0.305: U$1.2 55.88,55.63 56.39,56.01 56.39,57.53 55.75,58.04 51.44,58.04 50.42,57.66 51.31,54.86 50.8,54.36 | U$2.3 43.05,54.36 43.56,53.85 43.56,52.32 44.07,51.82 49.66,51.82 +7.P$1
  Top 0.406: LED2.C 54.86,73.41
  Top 2.184: R21.1 55.53,78.14 54.86,77.47 54.86,73.41 54.86,63.75 54.56,63.45 v53.7,62.59 53.09,61.98 50.56,61.98 Q6.3 50.8,61.74 50.8,59.05 50.8,54.36 +7.P$1
  Bottom 0.254: U$15.3 64.85,55.9 63.75,57 55.22,57 53.44,58.78 53.44,62.33 v53.7,62.59
N$33  (via drill 0.5)
  Top 0.254: Q6.1 45.97,59.82 46.47,59.33 R28.2 45.86,59.33 v45.21,58.67
  Bottom 0.254: v45.21,58.67 45.21,61.34 46.1,62.23 51.03,62.23 R44.1
N$34
  Bottom 0.254: U$16.4 50.51,57.37 51.05,57.91 51.05,60.26 R44.2
N$35
  Top 0.406: LED5.A R26.1
N$36
  Bottom 0.305: R27.2 52.19,113.95 U$13.1
N$37
  Top 0.406: R26.2 50.04,73.41 50.29,73.15
  Top 2.184: R11.2 50.8,73.66 50.29,73.15 48.51,71.37 48.51,69.15 Q6.2
N$38
  Top 0.305: U2.1 8.7,26.28 arc-70 C5.1
N$39
  Top 0.254: C24.1 15.49,34.21 16.24,34.96 20.54,34.96 20.74,34.76 U9.5 | U9.5 | U9.5 22.91,34.11 25.53,31.5 31.12,31.5 31.37,31.75 31.37,32.89 31.24,33.02 30.02,33.02 U8.21
N$40
  Top 0.254: U8.17 4.52,36.16 ICSP.4
N$41  (via drill 0.5)
  Top 0.254: Q8.1 33.66,61.61 33.66,59.44 34.15,58.94 R34.2 32.91,58.94 v32.51,58.55
  Bottom 0.254: v32.51,58.55 32.51,58.67 35.34,61.5 R50.1
N$42
  Bottom 0.254: R37.2 66.1,54.97 U$15.4
N$43
  Top 0.254: U8.16 3.69,36.96 ICSP.5
N$44
  Top 0.406: LED6.A R32.1
N$45
  Bottom 0.254: U$14.1 61.96,111.86 R33.2
N$46
  Top 0.254: U8.18 27.12,35.36 26.92,35.56 6.66,35.56 6.17,35.08 6.17,28.19 5.26,27.28 3.21,27.28 ICSP.1
  Bottom 0.254: R8.1 3.38,27.65 ICSP.1
N$47
  Top 0.406: R32.2 36.32,73.41
  Top 2.184: R9.2 38.35,75.44 36.32,73.41 36.32,69.6 36.07,69.34 36,69.34 Q8.2
N$48  (via drill 0.5)
  Top 0.254: U1.1 59.56,43.71 59.44,43.89 56.54,43.89 56.39,43.74 56.39,41.91 55.93,41.45 v55.12,41.45
  Bottom 0.254: v55.12,41.45 56.69,41.45 57.05,41.15 57.05,40.69 57.51,40.23 57.51,28.24 59.08,26.67 RTD5-8.2
N$49  (via drill 0.6)
  Top 0.254: U1.2 58.29,41.48 v58.01,41.2
  Bottom 0.254: 60.91,29.26 RTD5-8.4 59.03,29.21 58.01,30.23 v58.01,41.2
N$50  (via drill 0.5)
  Top 0.254: Q10.1 20.45,61.87 20.45,59.82 20.94,59.33 R40.2 20.08,59.33 v19.56,58.8
  Bottom 0.254: v19.56,58.8 19.69,58.8 21.84,60.96 25,60.96 R56.1
N$51
  Bottom 0.254: U$19.4 10.9,54.25 10.41,54.74 8.76,54.74 8.38,55.12 8.38,57.02 8.89,57.53 11.29,57.53 R62.2
N$52
  Top 0.406: LED7.A R38.1
N$53
  Bottom 0.254: U$15.1 66.12,49.96 65.79,50.29 61.98,50.29 61.47,49.78 61.47,48.98 R39.2
N$54
  Top 0.406: R38.2 25.4,73.41
  Top 2.184: R7.2 25.4,73.41 25.4,71.88 23.11,69.6 23.11,68.58 22.86,68.83 Q10.2
N$55  (via drill 0.6)
  Top 0.254: U1.4 55.75,44.12 56.03,44.4 60.1,44.4 60.6,43.89 60.6,42.16 59.64,41.2 v59.38,41.2
  Bottom 0.254: v59.38,41.2 59.38,40.79 58.83,40.23 58.83,32.77 59.84,31.75 RTD5-8.6
N$56  (via drill 0.6)
  Top 0.254: U1.5 54.48,44.53 54.92,44.96 60.76,44.96 61.67,44.04 61.67,41.66 v61.42,41.4
  Bottom 0.254: v61.42,41.4 60.86,41.4 59.69,40.23 59.69,35.56 RTD5-8.8
N$57  (via drill 0.5)
  Top 0.254: R47.2 8.25,58.8 8,59.05 8,61.54 Q12.1 8.33,61.21 v10.16,61.21
  Top 0.305: Q12.1 7.98,61.61 7.62,61.98
  Bottom 0.254: R62.1 11.3,61.09 11.18,61.21 v10.16,61.21
N$58
  Bottom 0.61: R12.2 26.08,122.51 26.67,121.92 26.67,120.6 U$11.4
N$59
  Top 0.406: LED8.A R45.1
N$60
  Bottom 0.254: U$16.1 48.94,49.35 48.41,48.82 39.78,48.82 39.17,48.21 39.17,47.16 R46.2
N$61
  Top 0.254: 10.41,68.33 10.39,68.33 Q12.2
  Top 0.406: R45.2 12.7,73.41
  Top 2.184: R1.2 12.7,73.41 12.7,72.64 10.41,70.36 10.41,68.33 10.67,68.07
N$62  (via drill 0.6)
  Top 0.406: R53.2 48.01,126.87 | 48.01,126.87 48.01,125.98 48,125.98 Q1.1 | 48.01,126.87 49.15,126.87 v49.78,127.25
  Bottom 0.406: v49.78,127.25 51.82,127.25 52.07,127 52.32,126.46 R25.1
N$63
  Bottom 0.406: U$12.4 40.08,124.11 R18.2
N$64
  Top 0.254: 57.91,114.32 57.91,116.08 58.42,116.08 Q2.2 | R15.2 58.42,112.01
  Top 2.184: Q2.2 58.42,112.01 R22.2
N$65
  Bottom 0.254: U$17.1 38.46,49.07 38.05,48.67 35.3,48.67 R52.2
N$66
  Top 0.254: R51.1 49.02,112.01 50.29,113.28 50.29,124.88 LED10.A
N$67
  Bottom 0.406: R25.2 52.38,121.56 U$13.4
N$68
  Top 0.254: R51.2 45.97,112.01 45.72,112.27
  Top 2.184: Q1.2 45.72,112.27 R23.2 45.72,106.68
N$69  (via drill 0.5)
  Top 0.254: LED11.C 43.56,125.86 v43.69,125.98
  Top 0.305: U$7.2 45.72,131.32 | U$6.3 55.63,132.59 56.13,133.1 56.13,134.62 55.63,135.13 46.23,135.13 45.72,134.62 +4.P$1
  Top 0.406: R53.1 44.2,126.87 | 44.2,126.87 43.69,126.87 43.69,127 | v43.69,125.98 43.69,126.37 44.2,126.87
  Top 0.61: 43.94,130.3 43.94,130.05 44.32,129.67
  Top 2.184: +4.P$1 45.72,131.32 45.72,131.06 44.32,129.67 43.69,129.03 43.69,127 v43.69,125.98 43.69,123.67 Q1.3 42.7,122.68 40.64,122.68 39.62,121.67 39.62,110.74 38.1,109.22 R29.1
  Bottom 0.406: U$12.3 38.81,118.93 39.62,118.11 42.67,118.11 42.93,118.36 42.93,125.22 v43.69,125.98
N$70  (via drill 0.6)
  Top 0.254: LED10.C 52.87,124.93 53.34,124.46 53.34,122.94
  Top 0.305: U$6.2 58.17,131.32 58.42,131.57 | U$55.3 68.58,132.59 68.83,132.84 68.83,134.62 68.33,135.13 58.93,135.13 58.42,134.62 +5.P$1
  Top 0.406: R6.1 56.27,126.37 v56.13,126.24
  Top 2.184: +5.P$1 58.42,131.57 58.42,129.79 56.13,127.51 v56.13,126.24 Q2.3 55.66,122.94 53.34,122.94 52.32,121.92 52.32,112.01 50.8,110.49 R23.1
  Bottom 0.406: U$13.3 51.06,119.38 51.31,119.13 53.85,119.13 54.36,119.63 54.36,121.64 Q2.3 56.14,125.98 56.13,125.98 v56.13,126.24
N$72  (via drill 0.6)
  Top 0.254: Q15.1 35.3,123.95 36.32,124.97 36.32,126.6 R59.2 36.31,126.98 36.83,127.51 v38.35,127.51
  Bottom 0.254: v38.35,127.51 39.88,127.51 40.13,127.25 40.13,126.16 R18.1
N$73
  Bottom 0.254: U$18.1 24.93,49.49 25.4,49.02 27.13,49.02 R58.2
N$74
  Top 0.254: LED11.A 38.7,124.55 37.85,123.7 37.85,113.28 36.58,112.01 R57.1
N$75
  Bottom 0.254: U$14.4 61.96,120.94 62.69,121.67 62.69,123 R31.2
N$76
  Top 0.254: R57.2 33.42,112.38 33.02,112.78
  Top 2.184: Q15.2 33.02,112.78 R29.2 33.02,106.68
N$77
  Bottom 0.254: R64.2 10.86,46.09 U$19.1
N$78
  Bottom 0.254: U$17.4 38.46,59.4 R50.2
N$79  (via drill 0.6)
  Top 0.254: LED12.C 30.61,126.11 30.73,125.98 | R59.1 32.89,126.62 31.88,127.63
  Top 0.305: U$8.2 32.26,131.32 +3.P$1 33.02,134.87 33.53,135.38 42.67,135.38 43.18,134.87 43.18,133.1 42.67,132.59 U$7.3
  Top 1.93: +3.P$1 33.02,128.78 31.88,127.63 30.73,126.49 30.73,125.98 Q15.3
  Top 2.184: R30.1 25.4,110.24 26.92,111.76 26.92,121.92 27.94,122.94 v28.96,122.94 30.26,122.94 Q15.3
  Bottom 0.61: U$11.3 25.29,118.98 25.91,118.36 28.45,118.36 28.7,118.62 28.7,122.68 v28.96,122.94
N$80  (via drill 0.6)
  Top 0.61: R65.2 22.08,126.25 22.61,125.73 | 22.61,125.73 Q17.1 | 22.61,125.73 22.61,126.24 22.35,126.49 23.62,126.49 v24.64,127.51
  Bottom 0.61: v24.64,127.51 25.15,127.51 25.91,126.75 25.91,125.55 R12.1
N$81
  Bottom 0.254: R56.2 25.17,57.47 U$18.4
N$82
  Top 0.254: LED12.A 25.78,126.11 25.15,125.48 25.15,113.54 23.88,112.27 R63.1
N$83
  Top 0.305: U$9.3 17.53,132.59 17.78,132.84 17.78,135.13 17.27,135.64 8.13,135.64 7.62,135.13 +1.P$1
  Top 0.61: 7.62,128.02 7.24,128.4 | R71.1 7.13,126.98 6.48,127.63
  Top 2.184: +1.P$1 7.62,128.78 7.24,128.4 6.48,127.63 5.33,126.49 Q19.3
N$84
  Top 0.254: R63.2 20.72,112.38 20.32,112.78
  Top 2.184: R30.2 20.32,112.78 20.32,116.33 19.81,116.84 20,116.84 Q17.2
N$87  (via drill 0.6)
  Top 0.254: LED13.C 17.27,127.25 18.16,126.37 | R65.1 20.08,128.2 20.04,128.25
  Top 0.305: U$9.2 20.07,131.32 20.32,131.57 | U$8.3 30.23,132.59 30.48,132.84 30.48,135.13 29.97,135.64 20.83,135.64 20.32,135.13 +2.P$1
  Top 1.93: +2.P$1 20.32,131.57 20.32,128.52 20.04,128.25 18.16,126.37 18.03,126.24 Q17.3
  Top 2.184: R35.1 12.7,110.24 13.97,111.51 13.97,122.43 14.73,123.19 v15.24,123.19 17.81,123.19 Q17.3
  Bottom 0.61: U$10.3 11.85,118.71 11.94,118.62 14.73,118.62 14.99,118.87 14.99,122.94 v15.24,123.19
N$88  (via drill 0.6)
  Top 0.61: Q19.1 9.9,123.95 | 9.9,123.95 9.9,124.21 9.65,124.46 | 9.9,123.95 9.91,123.96 9.91,125.73 9.13,126.51 R71.2 11.18,126.75 v11.68,127.25
  Bottom 0.61: v11.68,127.25 11.68,125.46 R68.1
N$89  (via drill 0.5)
  Top 0.254: v7.11,55.75 5.46,55.75 5.33,55.88
  Top 0.305: U$5.2 5.08,55.63 5.33,55.88 5.59,56.13 5.59,61.98 4.83,62.74 GND.P$1
  Top 0.406: LED8.C 3.78,73.44 3.3,73.91
  Top 2.184: R1.1 4.48,78.14 3.3,76.96 3.3,73.91 GND.P$1
  Bottom 0.254: U$19.3 9.63,53.74 9.27,54.1 8.25,54.1 7.75,54.61 7.75,55.5 7.49,55.75 v7.11,55.75
N$90
  Top 0.254: LED13.A 13.43,124.93 12.19,123.7 12.19,113.54 10.67,112.01 R69.1
N$92
  Top 0.406: R69.2 7.75,112.01 7.62,112.14
  Top 2.184: Q19.2 7.62,112.14 R35.2
RS-A
  Top 0.305: U7.6 60.24,6.22 U6.2
  Bottom 0.305: R42.1 60.78,6.56 U6.2
RS-B
  Top 0.305: U7.7 57.77,7.49 58.94,8.66 U6.3
  Bottom 0.305: R42.2 60.44,8.56 U6.3
RX  (via drill 0.5)
  Top 0.305: v52.32,8.38 51.94,8.76 U7.1 49.63,9.47 R5.2
  Bottom 0.254: U3.7 53.3,3.51 53.85,4.06 53.85,6.86 v52.32,8.38
RX1  (via drill 0.5)
  Top 0.254: U8.1 39.76,40.22 39.01,39.47 35.81,39.47 v35,38.66
  Bottom 0.254: v35,38.66 33.99,38.66 33.58,38.25 33.63,6.3 34.24,5.59 35.56,4.27 36.98,4.27 37.69,3.56 38.64,3.56 U3.2
T1
  Top 0.254: U1.3 57.02,41.33 56.29,40.59 49.23,40.59 48.41,39.78 48.41,38.46 45.64,35.69 | 45.64,35.69 43.69,33.73 41.6,33.73 U8.36 | R3.2 46.13,35.2 45.64,35.69
T2  (via drill 0.6)
  Top 0.254: U8.38 42.93,35.36 v45.77,38.2 45.82,38.71 45.82,40.84 47.8,42.77 47.8,44.75 48.31,45.26 51.92,45.26 52.78,46.13 68.73,46.13 69.49,45.41 69.49,42.93 U5.3 | R4.2 48.72,36.78 v49.07,37.13
  Bottom 0.254: v49.07,37.13 46.89,37.13 v45.77,38.2
TX  (via drill 0.5)
  Top 0.305: U7.4 v52.32,4.95 53.34,4.95 53.72,5.33 53.72,10.67 54.23,11.18 55.75,11.18 56.13,11.55 R2.2
  Bottom 0.254: U3.6 51.26,4.78 51.56,5.08 51.82,4.95 52.12,5
  Bottom 0.305: 52.12,5 v52.32,4.95
TX1  (via drill 0.5)
  Top 0.254: U8.44 40.42,40.16 39.12,38.86 36.27,38.86 35.92,38.51 v35.92,37.44
  Bottom 0.254: v35.92,37.44 34.49,37.44 34.14,37.08 34.14,6.5 35.87,4.77 U3.3 38.59,4.88
V+  (via drill 0.6)
  Top 0.254: TX.A RX.A
  Top 0.305: 53.59,12.19 53.59,12.41 53.54,12.46 51.84,12.46 51.84,10.86 v51.64,10.66
  Top 0.406: TX.A 53.72,12.31 53.59,12.19 | RX.A 51.82,12.45 | v57.34,10.36 57.34,9.06 57.04,8.76 U7.8
  Top 0.61: v47.64,1.66 47.84,1.66 48.34,1.16
  Top 0.813: U4.1 47.02,2.28 v47.64,1.66 48.14,1.16 48.34,1.16 62.34,1.16 63.34,2.16 63.34,12.06 61.74,13.66 60.42,13.66 U6.5
  Bottom 0.305: C7.1 57.26,10.28 v57.34,10.36 57.04,10.66 v51.64,10.66
  Bottom 0.406: C22.1 47.94,1.96 v47.64,1.66
  Bottom 0.61: U6.5 58.62,13.74 57.84,12.96 57.84,10.86 v57.34,10.36 | U3.8 47.06,2.24 v47.64,1.66
  Bottom 0.813: C6.1 60.79,14.19 U6.5
VCC
  Top 2.54: F1.1 31.35,3.83 C+.P$1
VSS
  pour Top (no thermals): 16.51,13.84 18.29,13.84 18.67,14.22 25.27,14.22 25.53,13.97 25.53,13.21 25.78,12.95 28.58,12.95 29.34,14.22 32,14.22 32,9.91 29.08,9.91 28.58,10.54 26.29,10.54 26.04,10.8 26.04,11.3 25.78,11.56 22.1,11.56 21.59,12.06 19.18,12.06 18.8,11.68 16.51,11.68 16.38,11.81 16.38,13.72

## Text on the board
tNames: RJ
Measures: 5 mmTall top | 2.1 mmTall bot | PCB | Connector | Opto
_tsilk: +1 | +2 | +3 | +4 | +5 | R65 | LED12 | R59 | R53 | R6 | LED4 | R71 | Q19 | LED13 | LED11 | LED10 | Q15 | Q1 | Q2 | Q17 | R69 | R63 | R57 | R51 | R15 | R1 | R7 | R9 | R29 | R11 | R21 | R35 | R30 | R23 | R22 | R45 | LED7 | R32 | R26 | R14 | LED6 | LED5 | LED2 | LED8 | R38 | GND | Q12 | Q10 | Q8 | Q6 | Q4 | R47 | R40 | R34 | R28 | R20 | +10 | +9 | +8 | +7 | +6 | RJ | U8 | U1 | ICSP | U5 | U9 | R3 | C24 | C8 | L1 | C23 | + | R4 | RTD1-4 | RTD5-8 | RTD9-12 | LED1 | R10 | C5 | C11 | R72 | R24 | U2 | + | LED3 | D2 | TX | RX | L4 | C-GND | R2 | R5 | C4 | V2 | U4 | U7 | D4 | D9 | L3 | D1 | C+ | + | F1 | LED9 | R43
_bsilk: C15 | C12 | C13 | C14 | C16 | R18 | R25 | R12 | R31 | R68 | R33 | R19 | R27 | R70 | R13 | D:/Dropbox/EV/2015/Logo/OL-BW.bmp | R44 | R56 | R50 | R62 | R37 | C18 | C19 | C40 | C17 | C1 | R39 | R58 | R52 | R46 | R64 | C20 | C3 | C21 | C2 | R8 | C6 | U3 | C7 | R42 | C22